# Altium PCB StepperDriverV2.PcbDoc
Units mil, origin at the board's own origin, x right, y up, seen from the top; angles counter-clockwise.
Board outline 1771.65 x 1765 mil, 2 copper layers (Top Layer, Bottom Layer); 46 components, 63 nets, 222 pads, 69 vias.
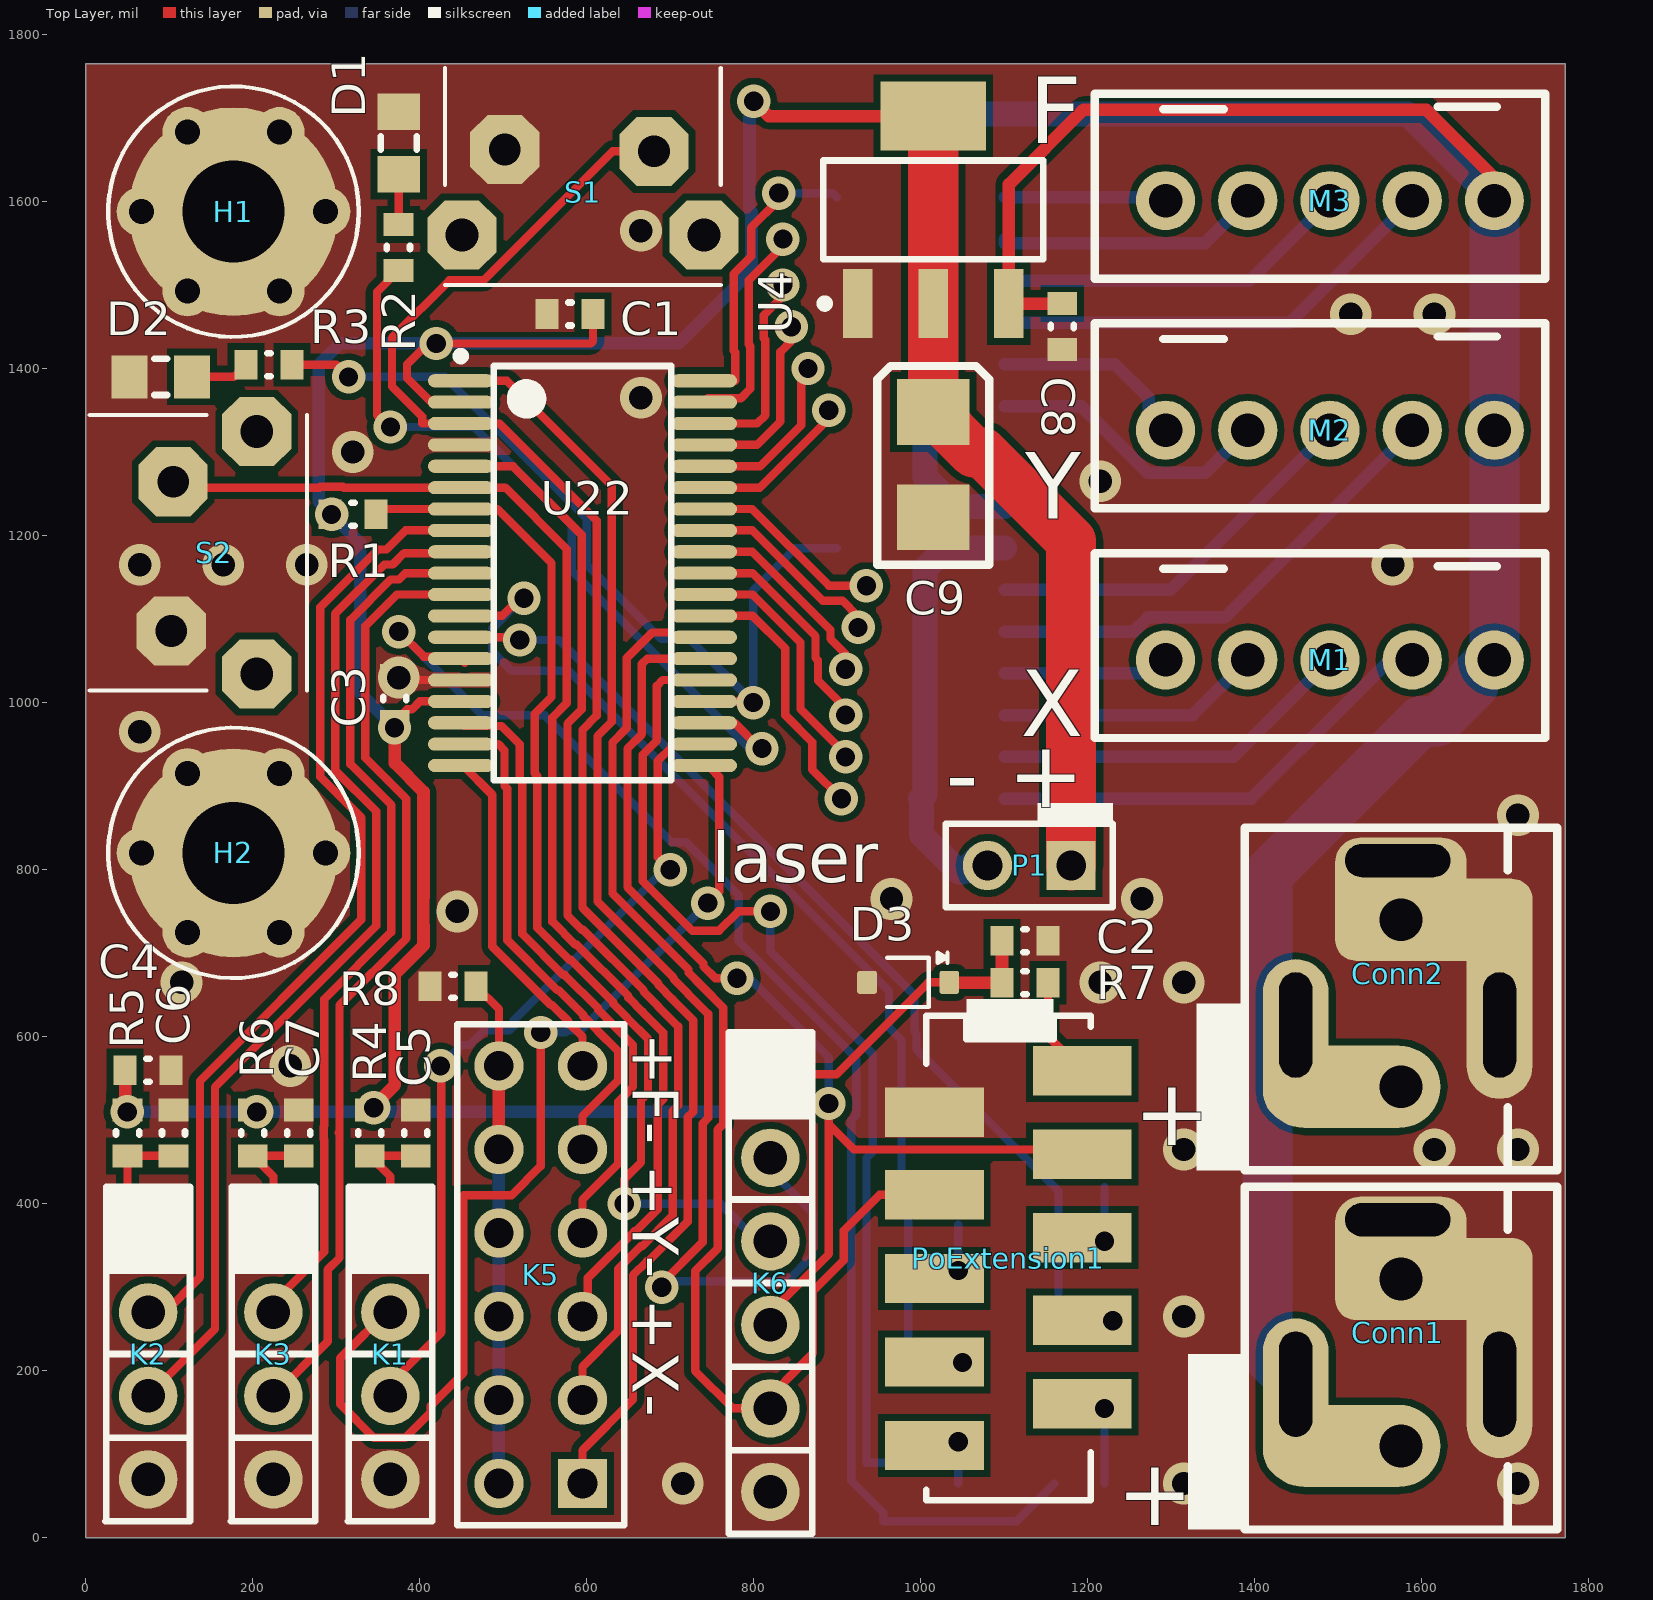
[diagram p0: Top Layer view]
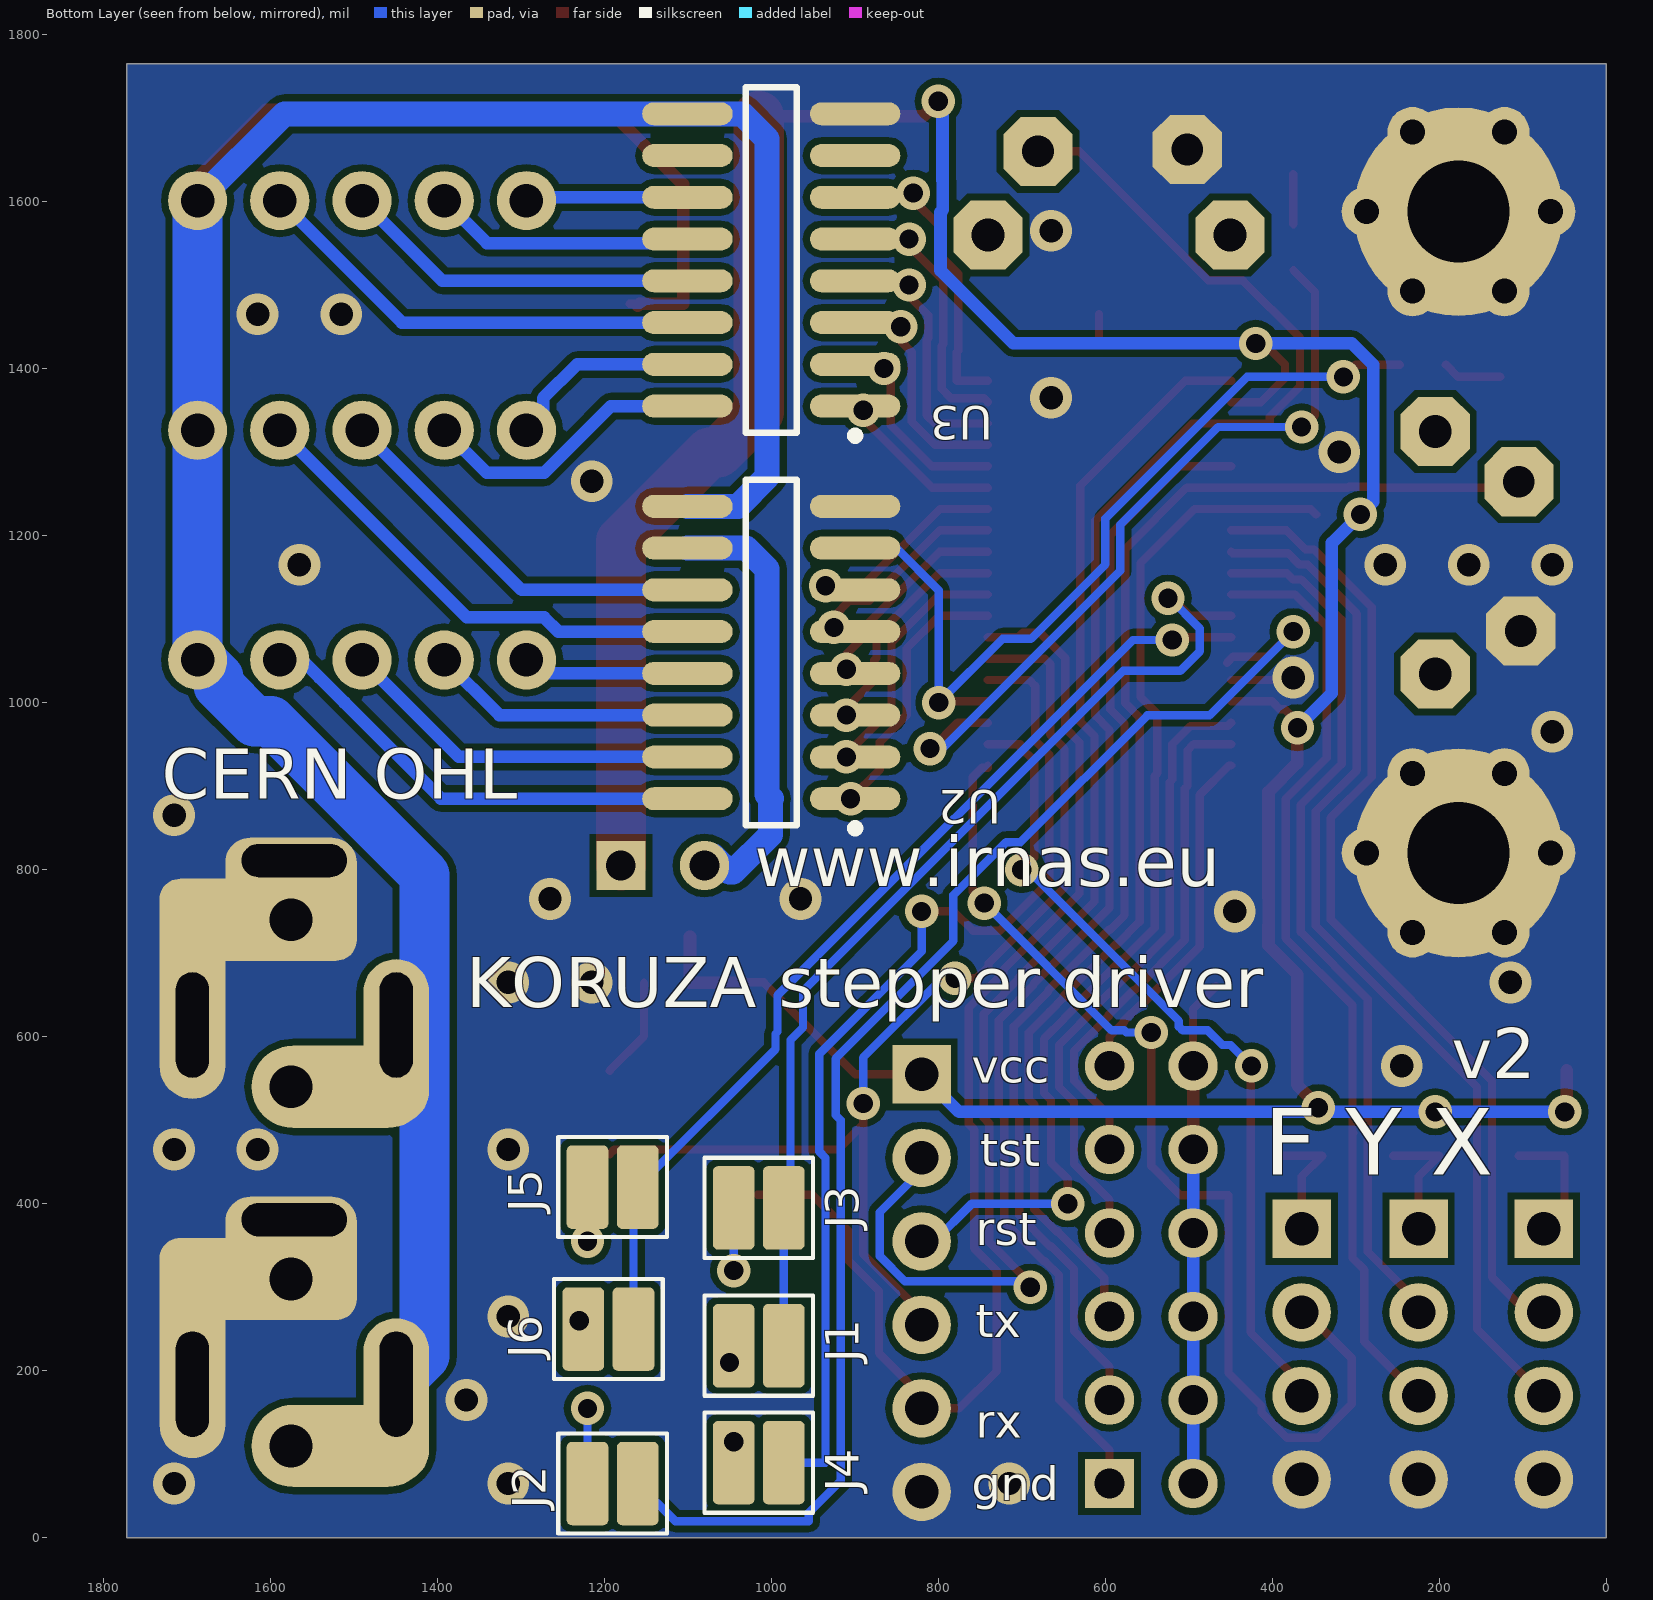
[diagram p1: Bottom Layer view, seen from below]

## Layer stack, top to bottom
Top Solder: solder mask 0.4, Solder Resist, Dk 3.5
Top Layer: signal copper 1.4
Dielectric 1: dielectric 12.6, FR-4, Dk 4.8
Bottom Layer: signal copper 1.4
Bottom Solder: solder mask 0.4, Solder Resist, Dk 3.5

## Board outline
0,1765 1771.65,1765 1771.65,0 0,0

## Design rules (kind name [scope] priority, off if disabled: settings)
Clearance [All] p1: gap=8
PolygonConnect [All] p1: connectstyle=Direct reliefconductorwidth=10 reliefentries=4 polygonreliefangle="90 Angle" airgapwidth=10
RoutingVias [All] p1: holewidth=23 width=40 viastyle="Through Hole" minholewidth=23 minwidth=40 maxholewidth=23 maxwidth=40
SolderMaskExpansion [All] p1: expansion=4
UnpouredPolygon [All] p1: allowunpoured=FALSE
Width [All] p1: maxlimit=60 minlimit=10 preferedwidth=15
29 further rules are at their usual default settings.

## Components (designator, comment, footprint, x,y, rotation, side; value= is the part's Value field where it differs from the comment)
C1 "Capacitor" 0603 580,1465 r180 top
C2 "Capacitor" 0603 1125,715 r0 top
C3 "Capacitor" 0603 370,1005 r90 top
C4 "Capacitor" 0603 75,560 r0 top
C5 "Capacitor" 0603 395,485 r90 top
C6 "Capacitor" 0603 105,485 r90 top
C7 "Capacitor" 0603 255,485 r90 top
C8 "Capacitor" 0603 1170,1450 r270 top
C9 "TAJB106K020R" AVX-CAPC3528_V 1015,1285 r270 top
Conn1 "PowerScrewTerminal" "MKDSN 2,5/ 2-5,08 and powercon" 1575,310 r0 top
Conn2 "PowerScrewTerminal" "MKDSN 2,5/ 2-5,08 and powercon" 1575,740 r0 top
D1 "LED" RESC2012X06N 375,1670 r90 top
D2 "LED" RESC2012X06N 90,1390 r180 top
D3 "3.3V" SOD323 985,665 r180 top
H1 "M" MOUNTING 177.17,1587.84 r0 top
H2 "M" MOUNTING 177.17,820.12 r0 top
J1 "Jumper" JUMP1 1015,90 r180 bottom
J2 "Jumper" JUMP1 1190,65 r180 bottom
J3 "Jumper" JUMP1 1015,395 r0 bottom
J4 "Jumper" JUMP1 1015,230 r0 bottom
J5 "Jumper" JUMP1 1190,420 r0 bottom
J6 "Jumper" JUMP1 1195,250 r0 bottom
K1 "HEADER-1X4" HEADER-1X4 365,370 r0 top
K2 "HEADER-1X4" HEADER-1X4 75,370 r0 top
K3 "HEADER-1X4" HEADER-1X4 225,370 r0 top
K5 "Header 6X2" HDR2X6 595,65 r90 top
K6 "HEADER-1X6" HEADER-1X6 820,555 r0 top
M1 "28BYJ-48" XHP-5 1490,1055 r180 top
M2 "28BYJ-48" XHP-5 1490,1330 r180 top
M3 "28BYJ-48" XHP-5 1490,1605 r180 top
P1 "Header 2" HDR1X2 1180,805 r180 top
PoExtension1 "" 8-188275-0 1105,335 r270 top
R1 "10k" 0603 320,1225 r180 top
R2 "1k" 0603 375,1545 r270 top
R3 "1k" 0603 220,1405 r0 top
R4 "10k" 0603 340,485 r90 top
R5 "10k" 0603 50,485 r90 top
R6 "10k" 0603 200,485 r90 top
R7 "/" 0603 1125,665 r0 top
R8 "10k" 0603 440,660 r180 top
S1 "SW_THT_ANGLE" TACT_Angle 590.55,1610 r180 top
S2 "SW_THT_ANGLE" TACT_Angle 155,1174.45 r270 top
U2 "ULN2003" "SO-16 narrow" 1000,1060 r0 bottom
U3 "ULN2003" "SO-16 narrow" 1000,1530 r0 bottom
U4 "LD1117S33TR" SOT-223_L 1015,1590 r90 top
U22 "MSP430G2955" R-PDSO-G38 595,1155 r0 top

## Footprints (in the part's own frame and the unit in brackets; to place one, negate y for a bottom-side part, rotate by r counter-clockwise, add the part's x,y. Pads: shape width x height; smd on the part's side, far side on the other; paste and mask are expansions set on the pad)
8-188275-0 [mm] "Micro-Match Female-On-Board  10 Positions SMD"
  rect 1.5x3 smd: 1(-5.7,2.25) 2(-4.43,-2.25) 3(-3.16,2.25) 4(-1.92,-2.25) 5(-0.62,2.25) 6(0.62,-2.25) 7(1.89,2.25) 8(3.16,-2.25) 9(4.43,2.25) 10(5.7,-2.25)
  silkscreen extent -7.37,-2.5 7.37,2.5, body extent -7.31,-3.45 7.32,3.45, height 5.3
0603 [mm] "Chip Resistor, 2-Leads, Body 1.6x0.8mm, IPC Medium Density"
  rect 0.7x0.9 smd: 1(-0.703,-0.008) 2(0.697,-0.008)
  silkscreen extent -0.05,-0.36 0.05,0.34, body extent -0.85,-0.48 0.85,0.47, height 0.6
AVX-CAPC3528_V [mm] "SMT Capacitor, 2 Leads, Body 3.5x2.8mm"
  rect 2x2.2 smd: 1(-1.6,0) 2(1.6,0)
  silkscreen extent -3,-1.7 3.05,1.7, body extent -1.79,-1.54 1.8,1.54, height 1.9
HDR1X2 [mm] "Connector; Header; 2 Position"
  rect 1.5x1.5 hole 0.9: 1(0,0)
  round 1.5 hole 0.9: 2(2.54,0)
  silkscreen extent -1.27,-1.27 3.81,1.27
HDR2X6 [mm] "Connector; Header; 6x2 Position"
  rect 1.5x1.5 hole 0.9: 1(0,0)
  round 1.5 hole 0.9: 2(0,2.54) 3(2.54,0) 4(2.54,2.54) 5(5.08,0) 6(5.08,2.54) 7(7.62,0) 8(7.62,2.54) 9(10.16,0) 10(10.16,2.54) 11(12.7,0) 12(12.7,2.54)
  silkscreen extent -1.27,-1.27 13.97,3.81
HEADER-1X4 [mil]
  rect 70x70 hole 40: 1(0,0)
  round 70 hole 40: 2(0,-100) 3(0,-200) 4(0,-300)
  silkscreen extent -51,-350 50,50, body extent -50,-350 50,50, height 470
HEADER-1X6 [mil]
  rect 70x70 hole 40: 1(0,0)
  round 70 hole 40: 2(0,-100) 3(0,-200) 4(0,-300) 5(0,-400) 6(0,-500)
  silkscreen extent -50,-550 50,50, body extent -50,-550 50,50, height 470
JUMP1 [mil] "SMT Battery jumper pads"
  rrect25% 50x100 smd: 1(-30,0) 2(30,0)
  rrect25% 118x108 on Bottom Solder: SM(0,0)
  silkscreen extent -65,-60 65,60
"MKDSN 2,5/ 2-5,08 and powercon" [mm] "combined footprint"
  rrect50% 4x3 hole 1 slot 3.2 at 0 deg copper offset 0.1,-0.8: 1(-0.1,1.8)
  rrect50% 6x2.5 hole 1.3 copper offset 1,0: 1(0,0)
  oval 2x6.5 hole 1 slot 3.2 at 90 deg copper offset 0,1: 1(3,-3.2)
  oval 2x5 hole 1 slot 3.2 at 90 deg copper offset 0,-0.5: 2(-3.2,-3.2)
  oval 5.4x2.5 hole 1.3 copper offset -1.5,0: 2(0,-5.08)
  silkscreen extent -4.75,-7.62 4.75,2.8, body extent -4.88,-7.75 10.5,2.67, height 15
MOUNTING [mil]
  round 250 hole 122.05: 1(0,0)
  round 60 hole 30: 2(-55,95.26) 3(55,95.26) 4(110,0) 5(55,-95.26) 6(-55,-95.26) 7(-110,0)
  silkscreen extent -150,-150 150,150
R-PDSO-G38 [mm] "TSOP, 38-Leads, Body 12,50x6,10mm, Pitch 0,65mm, IPC Low Density"
  oval 2x0.4 smd: 1(-3.7,5.85) 2(-3.7,5.2) 3(-3.7,4.55) 4(-3.7,3.9) 5(-3.7,3.25) 6(-3.7,2.6) 7(-3.7,1.95) 8(-3.7,1.3) 9(-3.7,0.65) 10(-3.7,0) 11(-3.7,-0.65) 12(-3.7,-1.3) 13(-3.7,-1.95) 14(-3.7,-2.6) 15(-3.7,-3.25) 16(-3.7,-3.9) 17(-3.7,-4.55) 18(-3.7,-5.2) 19(-3.7,-5.85) 20(3.7,-5.85) 21(3.7,-5.2) 22(3.7,-4.55) 23(3.7,-3.9) 24(3.7,-3.25) 25(3.7,-2.6) 26(3.7,-1.95) 27(3.7,-1.3) 28(3.7,-0.65) 29(3.7,0) 30(3.7,0.65) 31(3.7,1.3) 32(3.7,1.95) 33(3.7,2.6) 34(3.7,3.25) 35(3.7,3.9) 36(3.7,4.55) 37(3.7,5.2) 38(3.7,5.85)
  silkscreen extent -3.82,-6.3 2.7,6.72, body extent -3.1,-6.3 3.1,6.3, height 1.2
RESC2012X06N [mm] "Chip Resistor, 2-Leads, Body 2.0x1.2mm, IPC Medium Density"
  rect 1.1x1.3 smd: 1(-0.95,0) 2(0.95,0)
  silkscreen extent -0.2,-0.55 0.2,0.55, body extent -1.08,-0.62 1.07,0.63, height 0.6
"SO-16 narrow" [mm] "SOIC, 16-Leads, Body 10.30x3.90mm, Pitch 1.27mm, IPC Low Density"
  oval 2.75x0.7 smd: 1(-2.55,4.445) 2(-2.55,3.175) 3(-2.55,1.905) 4(-2.55,0.635) 5(-2.55,-0.635) 6(-2.55,-1.905) 7(-2.55,-3.175) 8(-2.55,-4.445) 9(2.55,-4.445) 10(2.55,-3.175) 11(2.55,-1.905) 12(2.55,-0.635) 13(2.55,0.635) 14(2.55,1.905) 15(2.55,3.175) 16(2.55,4.445)
  silkscreen extent -2.67,-5.25 0.77,5.47, body extent -2,-5.25 2,5.25, height 2.65
SOD323 [mm] "SOD-323; 2 Leads; Body 1.8 x 1.35 mm, (LxW)"
  round 0.508 on Mech15: 0(0,0)
  rrect25% 0.6x0.7 smd: A(1.25,0) K(-1.25,0)
  silkscreen extent -1.2,-0.9 0.64,0.75, body extent -1.3,-0.68 1.3,0.68, height 1.1
SOT-223_L [mm] "SOT223, 4-Leads, Body 6.5x3.5mm, Pitch 2.3mm, Lead Span 7mm, IPC High Density"
  rect 2.1x0.9 smd: 1(-2.85,2.3) 2(-2.85,0) 3(-2.85,-2.3)
  rect 2.1x3.2 smd: 4(2.85,0)
  silkscreen extent -2.97,-3.35 1.5,3.42, body extent -1.85,-3.35 1.85,3.35, height 1.8
TACT_Angle [mm]
  oct 2.1x2.1 hole 1: 0(-3.81,1.27) 0(3.556,1.27)
  oct 2.1x2.1 hole 0.965: 1(-2.286,-1.27) 2(2.25,-1.33)
  silkscreen extent -4.32,-3.81 4.06,2.79, body extent -4.36,-9.65 4.14,2.75, height 7.4
XHP-5 [mm] "Connector"
  round 1.8 hole 1.02: 1(-5,0.1) 2(-2.5,0.1) 3(0,0.1) 4(2.5,0.1) 5(5,0.1)
  silkscreen extent -6.55,-3.15 7.15,2.47

## Part data
C1 C2 C3 C4 C5 C6 C7 C8: "General capacitor"
C9: library part CMP-0279-00001-1, "Capacitor, Tantalum, 10uF 10% 20V MCCT-B (3528)"
D1 D2: "LED diode"
D3: library part DIODE_ZENER_3V3_SOD323, "Diode Zener SMD 3.3V 200mW SOD-323"
H1 H2: library part MOUNTING, "MOUNTING HOLE - NON INSTALLABLE"
J1 J2 J3 J4 J5 J6: library part JUMP1, "SMD jumper"
K5: "Header, 6-Pin, Dual row"
M1 M2 M3: "Stepper motor"
P1: "Header, 2-Pin"
PoExtension1: library part 1-215079-0, "Micro-Match female PCB connector 10 Positions THT"
R1 R2 R3 R4 R5 R6 R7 R8: library part Resistor, "Resistor 0805 smd"
U2 U3: "Darlington array"
U4: library part CMP-0244-00310-1, "Fixed Low Drop Positive Voltage Regulator, 3.3V, 4-Pin SOT-223, Tape and Reel"

## Via types
v1: diameter 40, hole 23, Top Layer to Bottom Layer, tented both sides, 41 vias
v2: diameter 50, hole 28, Top Layer to Bottom Layer, tented both sides, 28 vias

## Nets (pads, with @x,y where several pads share a name; then routed paths per layer and width w, separated by ;. In a path a pad name is that pad's centre, name@x,y a point inside that pad or via, vN(x,y) a via of type N, cw(c..) or ccw(c..) an arc to the next point about the centre after c; other vN are vias at no path point)
3V3: C1.1 C2.1 C3.1 C4.1 C9.1 D3.K K6.1 P1.1 R1.2 R4.2 R5.2 R6.2 R7.1 U4.2 U4.4 U22.2 U22.16 | length 4611.3
  Top Layer w10: C3.1 384.99,992 390.74,992 400.2,1001.46 U22.16 ; U22.2 413.91,1359.72 385,1388.63 385,1405 410,1430 v1(420,1430) 605,1430 607.68,1432.68 C1.1 ; K6.1 899.21,555 1009.21,665 D3.K@1040,665
  Top Layer w15: C4.1 47.32,513.31 50.32,510.32 R5.2 ; R4.2@343.94,516.06 370.32,542.44 370.32,674.96 404.67,709.31 404.67,733.06 404.5,733.22 404.5,766.78 404.67,766.94 404.67,893.14 370.32,927.49 C3.1 ; v1(800,1720) 817.8,1702.21 U4.4 ; D3.K 1034.53,664.69 R7.1 C2.1@1097.32,719.69
  Top Layer w60: U4.4 U4.2 C9.1 1063.61,1299.38 1074.05,1299.38 1180,1193.43 P1.1
  Bottom Layer w15: v1(50,510) 775.03,510.03 K6.1 ; v1(370,970) 328.7,1011.3 328.7,1191.3 v1(294.69,1225.32) 279.5,1240.5 279.5,1404.7 304.8,1430 v1(420,1430) 710,1430 797.39,1517.39 797.39,1587.09 794.5,1589.98 794.5,1624.7 795,1625.2 795,1715 v1(800,1720)
  other v1: 205,510 345,515
C_F_1: U3.3 U22.35 | length 221.8
  Top Layer w10: U22.35 804,1308.54 832,1336.54 832,1420 845,1433 v1(845,1450)
C_F_2: U3.4 U22.36 | length 243.8
  Top Layer w10: U22.36 804.13,1334.13 814,1344 814,1434.33 812,1436.33 812,1463.67 835,1486.67 v1(835,1500)
C_F_3: U3.5 U22.37 | length 259
  Top Layer w10: U22.37 745.39,1364.44 784.58,1364.44 796,1375.86 796,1426.88 794,1428.88 794,1505.67 835,1546.67 v1(835,1555)
C_F_4: U3.6 U22.38 | length 356.9
  Top Layer w10: U22.38 778,1385.32 778,1419.42 776,1421.42 776,1513.13 797,1534.13 797,1568.67 830,1601.67 v1(830,1610)
  Bottom Layer w10: v1(830,1610) 894.61,1610 U3.6
C_X_1: U2.1 U22.27 | length 321
  Top Layer w10: U22.27 798.9,1103.82 838,1064.72 838,1038.67 838,1001.33 838,984.88 870,952.88 870,920 v1(905,885)
C_X_2: U2.2 U22.28 | length 298.6
  Top Layer w10: U22.28 798.77,1129.41 856,1072.18 856,1046.13 856,992.33 910,938.33 v1(910,935)
C_X_3: U2.3 U22.29 | length 274.1
  Top Layer w10: U22.29 798.63,1155 874,1079.63 874,1053.58 877,1050.58 877,1026.33 910,993.33 v1(910,985)
C_X_4: U2.4 U22.30 | length 244.6
  Top Layer w10: U22.30 798.5,1180.59 892,1087.09 892,1076.33 910,1058.33 v1(910,1040)
C_Y_1: U2.5 U22.31 | length 240.3
  Top Layer w10: U22.31 798.36,1206.18 882.54,1122 906.33,1122 925,1103.33 v1(925,1090)
C_Y_2: U2.6 U22.32 | length 232.3
  Top Layer w10: U22.32 798.23,1231.77 890,1140 v1(935,1140)
C_Y_3: U3.1 U22.33 | length 193.6
  Top Layer w10: U22.33 807.36,1257.36 890,1340 v1(890,1350)
C_Y_4: U3.2 U22.34 | length 207.7
  Top Layer w10: U22.34 807.5,1282.95 857,1332.46 857,1392 v1(865,1400)
CS: J1.2 U22.24 | length 1251.4
  Top Layer w10: U22.24 690.97,1027.05 684,1020.08 684,954.49 667,937.49 667,786.33 726.33,727 758.67,727 781.67,750 v1(820,750)
  Bottom Layer w10: v1(820,750) 820,702.13 942.58,579.54 942.58,462.58 935,455 935,90 J1.2
F_1: M3.2 U3.14 | length 548.5
  Bottom Layer w15: U3.14 1442.36,1455 M3.2
F_2: M3.3 U3.13 | length 429.4
  Bottom Layer w15: U3.13 1393.94,1505 M3.3
F_3: M3.4 U3.12 | length 317.1
  Bottom Layer w15: U3.12 1100.39,1550.13 1340.64,1550.13 M3.4
F_4: M3.5 U3.11 | length 194.4
  Bottom Layer w15: U3.11 1289.21,1605 M3.5
F_ENC_A: K1.3 U22.21 | length 994.2
  Top Layer w10: K1.3@365,175 365,185 426.03,246.03 426.03,563.97 v1(425,565) ; v1(700,800) 685,815 685,930.03 702,947.03 702,950.28 U22.21
  Bottom Layer w10: v1(425,565) 450,590 459.86,590 477.38,607.53 507.53,607.53 512,612 512,618.67 693.33,800 v1(700,800)
F_ENC_B: K1.2 U22.20 | length 1266.5
  Top Layer w10: K1.2@365,275 305,215 305,160 345,120 382.88,120 413,150.12 413,158 452.47,197.47 452.47,410 510,410 545,445 v1(545,605) ; U22.20 740.67,921.81 748.13,921.81 758.67,911.27 758.67,773.67 v1(745,760)
  Bottom Layer w10: v1(545,605) 574.86,605 577.38,607.53 592.53,607.53 v1(745,760)
F_MAX: K5.11 U22.19 | length 422.6
  Top Layer w10: U22.19 451.98,924.69 487,889.67 487,708 557,638 558.67,638 578,618.67 578,617 595,600 K5.11
F_MIN: K5.9 U22.18 | length 608.1
  Top Layer w10: U22.18 494.27,950.28 501.7,942.84 501.7,900.42 505,897.13 505,715.46 564.46,656 566.13,656 596,626.13 596,624.46 613,607.46 613,607.14 637.53,582.62 637.53,547.39 595,504.86 K5.9
GND: C1.2 C2.2 C3.2 C4.2 C5.2 C6.2 C7.2 C8.2 C9.2 Conn1.1 Conn2.1 D1.2 D2.2 D3.A H1.1 H1.2 H1.3 H1.4 H1.5 H1.6 H1.7 H2.1 H2.2 H2.3 H2.4 H2.5 H2.6 H2.7 K1.4 K2.4 K3.4 K6.6 PoExtension1.2 R8.2 S1.2 S2.2 U2.8 U3.8 U4.1 U22.4 U22.15 | length 81.2
  Top Layer w10: C3.2 375.71,1027.05 U22.15
  other v2: 715,65 1315,65 1715,65 1365,165 1315,265 1315,465 1615,465 1715,465 245,565 115,665 1215,665 1315,665 445,750 965,765 1265,765 1715,865 65,965 375,1030 65,1165 165,1165 265,1165 1565,1165 1215,1265 320,1300 665,1365 1515,1465 1615,1465 665,1565
LED_GREEN: R3.2 U2.7 U22.23 | length 1066.8
  Top Layer w10: R3.2 300.32,1404.69 v1(315,1390) ; U22.23 798.02,1001.46 v1(799.47,1000)
  Bottom Layer w10: v1(315,1390) 430.46,1390 600,1220.46 600,1165.46 689.12,1076.34 723.14,1076.34 v1(799.47,1000) 799.47,1134.47 850,1185 U2.7
MISO/SCL: J5.1 J6.1 U22.13 | length 1196.2
  Top Layer w10: U22.13 521.77,1078.23 520,1076.46 v1(520,1075)
  Bottom Layer w10: v1(520,1075) 567.13,1075 992.5,649.63 992.5,605.99 995,603.49 995,585 J5.1 1165,415 J6.1
MOSI/SDA: J3.1 J4.1 U22.12 | length 1240.4
  Top Layer w10: U22.12 498.82,1103.82 515,1120 v1@525,1120
  Bottom Layer w10: v1(525,1125) 523.33,1125 487,1088.67 487,1061.33 510.33,1038 578.67,1038 962,654.67 962,611.04 977,596.04 977,403 J3.1 J4.1
NetC5_1: C5.1 K1.1 R4.1 | length 147.5
  Top Layer w10: K1.1@365,375 365,432.64 R4.1 C5.1
NetC6_1: C6.1 K2.1 R5.1 | length 152.5
  Top Layer w10: K2.1 50.32,394.69 R5.1 C6.1
NetC7_1: C7.1 K3.1 R6.1 | length 152.5
  Top Layer w10: K3.1 225,432.64 R6.1 C7.1
NetD1_1: D1.1 R2.1 | length 60.1
  Top Layer w10: R2.1 375,1572.99 D1.1
NetD2_1: D2.1 R3.1 | length 71
  Top Layer w10: D2.1 177.64,1390 R3.1
NetJ1_1: J1.1 PoExtension1.10 | length 50
  Bottom Layer w10: J1.1@1045,65 v1(1045,115)
NetJ2_1: J2.1 PoExtension1.9 | length 90
  Bottom Layer w10: J2.1 v1(1220,155)
NetJ3_2: J3.2 PoExtension1.6 | length 55
  Bottom Layer w10: v1(1045,320) J3.2@1045,375
NetJ4_2: J4.2 PoExtension1.8 | length 7.1
  Bottom Layer w10: J4.2@1045,215 v1(1050,210)
NetJ5_2: J5.2 PoExtension1.5 | length 65
  Bottom Layer w10: v1(1220,355) J5.2
NetJ6_2: J6.2 PoExtension1.7 | length 12.1
  Bottom Layer w10: J6.2 1225,255 v1(1230,260)
NetK5_2: K5.2 K5.4 K5.6 K5.8 K5.10 K5.12 R8.1 | length 606.6
  Top Layer w10: R8.1 495,632.99 K5.12
  Top Layer w15: K5.10 K5.12
  Bottom Layer w15: K5.2 K5.4 K5.6 K5.8 K5.10
NetP1_2: P1.2 U2.10 | length 536.4
  Bottom Layer w30: P1.2 1068.94,816.06 1049.88,797 1045.88,797 1001.06,841.82 1001.06,883.94 1000,885 1005,890 1005,1160 1030,1185 U2.10
NetR2_2: R2.2 U22.22 | length 922.8
  Top Layer w10: v1@363,1330 349,1344 349,1491.87 R2.2 ; U22.22 776.94,975.87 807.8,945 v1(810,945)
  Bottom Layer w10: v1(365,1330) 465,1330 582,1213 582,1158 795,945 v1(810,945)
RST: K6.3 R1.1 U22.7 | length 1270
  Top Layer w10: R1.1 354.13,1231.77 U22.7 493.23,1231.77 558,1167 558,1006.68 537.7,986.38 537.7,915.34 541,912.04 541,730.37 579.37,692 581.04,692 632,641.04 632,639.37 649,622.37 649,622.06 673.53,597.53 673.53,532.47 665,523.95 665,449.4 645,429.4 v1(645,400) v1@650,405
  Bottom Layer w10: v1(645,400) 760,400 K6.3@805,355
RXD: K6.5 PoExtension1.4 U22.26 | length 1512.4
  Top Layer w10: U22.26 704.35,1078.23 698.58,1084 678.54,1084 648,1053.46 648,969.4 631,952.4 631,771.42 722,680.42 722,676.65 739,659.65 739,659.33 763.53,634.81 763.53,495.19 757,488.67 757,346.54 730,319.54 730,200 775,155 805,155 871,221 871,295.54 908,332.54 908,368 950.59,410.59 PoExtension1.4
SCK: J2.2 U22.14 | length 1682
  Top Layer w10: v1(375,1085) 405,1055 446.97,1055 U22.14@454.05,1047.92
  Bottom Layer w10: v1(375,1085) 475.23,984.77 549.77,984.77 701.54,833 718.67,833 782,769.67 782,714.67 923,573.67 923,506.33 917,500.33 917,68.28 955,30.28 955,20 1115,20 J2.2
TEST: K6.2 U22.1 | length 1617.7
  Top Layer w10: U22.1 504.69,1385.32 630,1260 630,976.86 613,959.86 613,761.86 704,670.86 704,669.19 721,652.19 721,651.88 745.53,627.35 745.53,502.65 739,496.12 739,354 690,305 v1(690,300)
  Bottom Layer w10: v1(690,300) 697,307 839.88,307 870,337.12 870,390 K6.2@805,455
TXD: K6.4 PoExtension1.3 U22.25 | length 1377.8
  Top Layer w10: U22.25 672.64,1052.64 666,1046 666,961.94 649,944.94 649,778.88 740,687.88 740,684.1 754.1,670 v1(780,670) ; K6.4@805,255 890,340 v1(890,520) 890,495 920,465 1187.99,465 PoExtension1.3
  Bottom Layer w10: v1(780,670) 795,670 890,575 v1(890,520)
VCC: C8.1 Conn1.2 Conn2.2 M1.1 M2.1 M3.1 U2.9 U3.9 U4.3 | length 3920
  Top Layer w10: U4.3 1105.67,1477.68 1157.32,1477.68 C8.1
  Top Layer w15: C8.1@1160,1475 1157.32,1477.68 1157.21,1477.8 U4.3 1105.55,1620.55 1195,1710 1605,1710 1686.85,1628.15 M3.1
  Bottom Layer w30: U2.9 1040,1235 1005,1270 1005,1675 1035,1705 U3.9 1582.91,1705 M3.1
  Bottom Layer w60: Conn1.2@1449.02,184.02 1415,218.03 Conn2.2@1415,560 ; Conn2.2@1575,540 1435,540 Conn2.2@1415,560 ; M3.1 M2.1 M1.1 1682.92,1051.06 1661.86,1030 1661.86,1020.65 1618.84,977.63 1599.02,977.63 1415,793.61 Conn2.2@1415,560
VCC_PO: PoExtension1.1 R7.2 | length 122.3
  Top Layer w10: R7.2 1152.44,600.55 PoExtension1.1
X_1: M1.2 U2.16 | length 557
  Bottom Layer w15: U2.16 1395.65,885 1510.78,1000.13 1511.1,1000.13 1540.93,1029.97 1540.93,1030.28 1561.72,1051.06 M1.2
X_2: M1.3 U2.15 | length 437.7
  Bottom Layer w15: U2.15 1373.94,935 M1.3
X_3: M1.4 U2.14 | length 318.5
  Bottom Layer w15: U2.14 1325.51,985 M1.4
X_4: M1.5 U2.13 | length 199.4
  Bottom Layer w15: U2.13 1277.09,1035 M1.5
X_ENC_A: K2.2 U22.8 | length 1188.3
  Top Layer w10: K2.2 95,270 137,312 137,547 330,740 330,797.63 330.17,797.8 330.17,862.28 281,911.45 281,1114.04 350.37,1183.41 360.37,1183.41 383.15,1206.18 U22.8
X_ENC_B: K2.3 U22.9 | length 1251.1
  Top Layer w10: K2.3 155,250 155,539.54 348,732.54 348,790.18 348.17,790.34 348.17,869.74 299,918.9 299,1106.58 357.83,1165.41 367.83,1165.41 381.42,1179 447.74,1179 U22.9
X_MAX: K5.3 U22.5 | length 1325.9
  Top Layer w10: U22.5 512.05,1282.95 594,1201 594,991.77 577,974.77 577,745.28 594.28,728 595.95,728 668,655.95 668,654.28 685,637.28 685,636.97 709.53,612.44 709.53,517.56 703,511.03 703,385.88 666.13,349 664.6,349 637.53,321.93 637.53,247.39 595,204.86 K5.3
X_MIN: K5.1 S1.1 U22.3 | length 2051.5
  Top Layer w10: K5.1 595,104.86 655.53,165.39 655.53,314.47 672.06,331 673.58,331 721,378.42 721,503.58 727.53,510.11 727.53,619.89 703,644.42 703,644.74 686,661.74 686,663.4 595,754.4 595,967.31 612,984.31 612,1218 495.87,1334.13 U22.3 402.97,1334.13 402.97,1342.54 367,1378.51 367,1437 435.66,1505.66 476.61,1505.66 630.94,1660 S1.1
Y_1: M2.2 U2.12 | length 587.9
  Bottom Layer w15: U2.12 1255.06,1085 1272.05,1102 1364.36,1102 M2.2
Y_2: M2.3 U2.11 | length 468.7
  Bottom Layer w15: U2.11 1298.94,1135 M2.3
Y_3: M2.4 U3.16 | length 345.4
  Bottom Layer w15: U3.16 1192.18,1355 1272.05,1275.13 1340.64,1275.13 M2.4
Y_4: M2.5 U3.15 | length 236.2
  Bottom Layer w15: U3.15 1232.53,1405 1273.03,1364.5 1273.03,1346.19 M2.5
Y_ENC_A: K3.2 U22.10 | length 1064.2
  Top Layer w10: K3.2 225,281.62 286.03,342.65 286.03,476.49 285.09,477.43 285.09,492.34 286.03,493.28 286.03,645.12 366,725.09 366,782.72 366.17,782.89 366.17,877.19 317,926.36 317,1099.13 365.29,1147.41 375.29,1147.41 382.88,1155 U22.10
Y_ENC_B: K3.3 U22.11 | length 1138.8
  Top Layer w10: K3.3 290,235 290,321.16 304.03,335.19 304.03,483.94 303.09,484.88 304.03,485.82 304.03,637.66 384.17,717.8 384.17,724.57 384,724.73 384,775.27 384.17,775.43 384.17,884.65 335,933.81 335,1091.67 372.74,1129.41 U22.11
Y_MAX: K5.7 U22.17 | length 748.6
  Top Layer w10: U22.17 453.2,972 498,972 519.7,950.3 519.7,907.88 523,904.58 523,722.91 571.91,674 573.58,674 614,633.58 614,631.91 631,614.91 631,614.6 655.53,590.07 655.53,539.93 637.53,521.93 637.53,447.39 595,404.86 K5.7
Y_MIN: K5.5 S2.1 U22.6 | length 1527.9
  Top Layer w10: S2.1 112.09,1257.36 280.06,1257.36 281.02,1258.32 308.35,1258.32 309.31,1257.36 U22.6 502.64,1257.36 576,1184 576,999.22 559,982.22 559,737.82 586.82,710 588.49,710 650,648.49 650,646.82 667,629.82 667,629.51 691.53,604.98 691.53,525.02 685,518.49 685,393.33 658.67,367 657.14,367 601.53,311.39 601.53,271.53 K5.5
pads on no net: D3.0 J1.SM J2.SM J3.SM J4.SM J5.SM J6.SM S1.0 S2.0 U3.7 U3.10

## Polygon pours and split planes (outlines as drawn)
GND on Top Layer "Top Layer-No Net" (solid, pour order 4): 0,1765 1771.65,1765 1771.65,0 0,0
GND on Bottom Layer "Top Layer-No Net1" (solid, pour order 6): 0,1765 1771.65,1765 1771.65,0 0,0

## Silkscreen, mask and mechanical layers (free items; w line width, h text height)
Top Overlay:
  rectangle: 1054.8,596.81 1159.13,645
  rectangle: 1330,440 1387.99,640
  rectangle: 1320,10 1387.99,220
  rectangle: 1140,855 1230,880
  text "F" at 1130,1670 h80
  text "Y" at 1125,1220 h80
  text "X" at 1120,960 h80
  text "- +" at 1030,875 h80
  text "laser" at 750,785 h60
  text "+F- +Y- +X-" at 655,605 h55 r270
  text "+" at 1255,470 h80
  text "+" at 1235,15 h80
Bottom Overlay:
  text "CERN OHL" at 1730,885 h60
  text "www.irnas.eu" at 1020,780 h60
  text "KORUZA stepper driver" at 1365,635 h60
  text "v2" at 185,550 h60
  text "vcc" at 760,545 h40
  text "tst" at 750,445 h40
  text "F Y X" at 410,435 h80
  text "rst" at 755,350 h40
  text "tx" at 755,240 h40
  text "rx" at 755,120 h40
  text "gnd" at 760,45 h40
Mechanical 3:
  the board outline again, w5